# Altium PCB Surf5_R110.PcbDoc
Units mm, origin at the board's own origin, x right, y up, seen from the top; angles counter-clockwise.
Board outline 75 x 21 mm, 4 copper layers (Top Layer, Internal Plane 1, Internal Plane 2, Bottom Layer), stack 0.603 mm thick; 72 components, 94 nets, 359 pads, 160 vias.
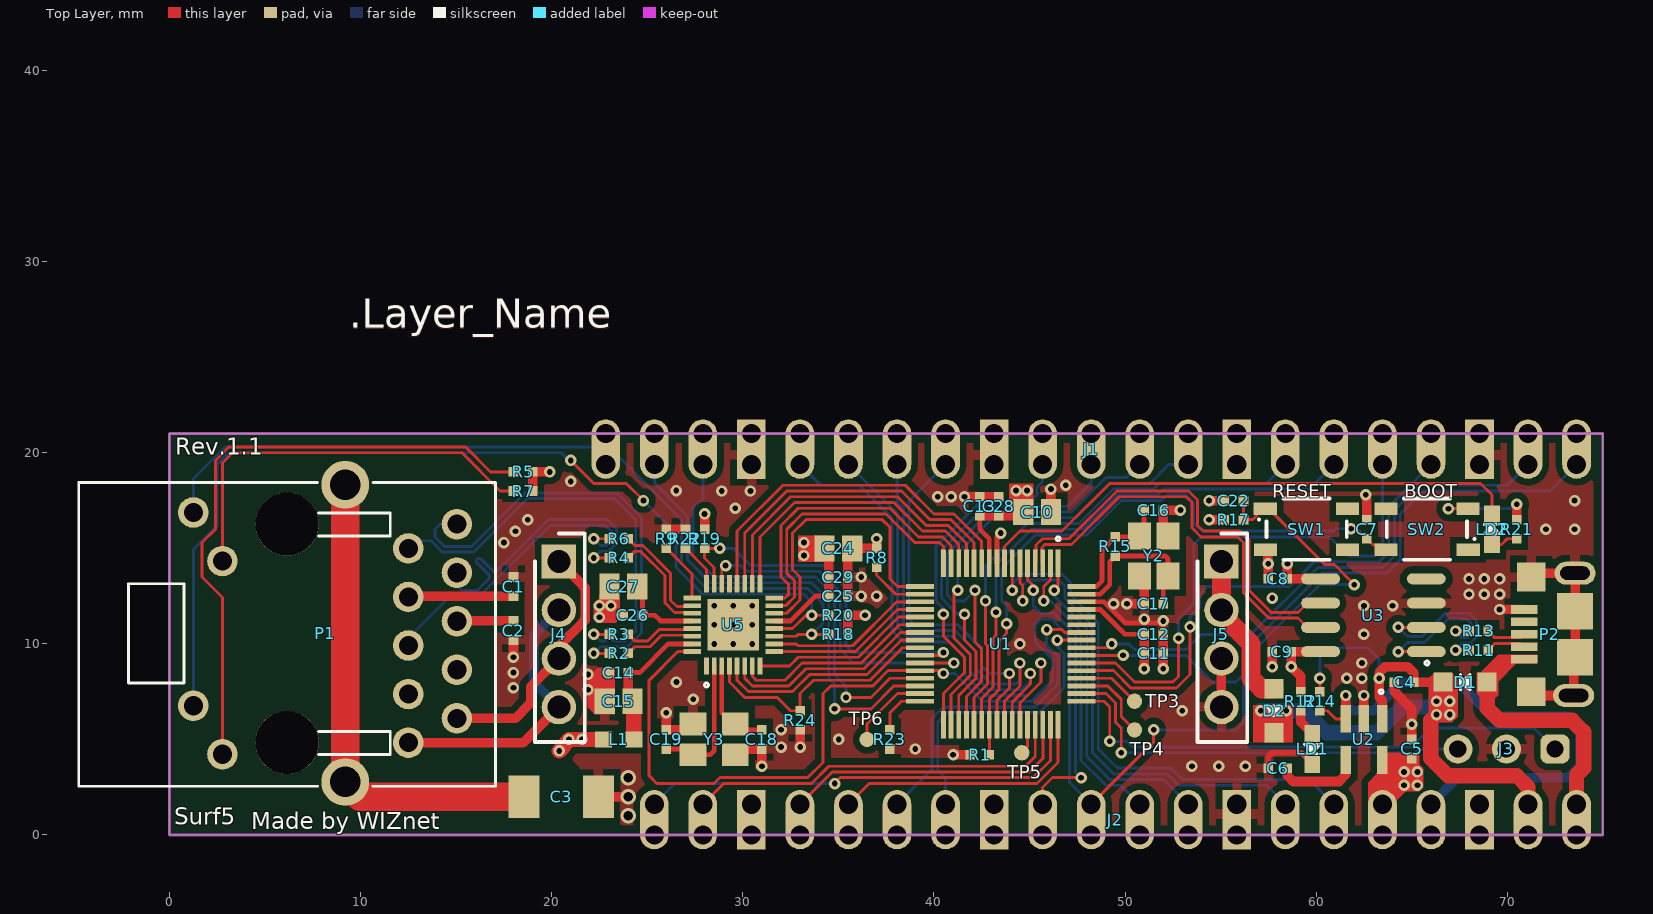
[diagram p0: Top Layer view]
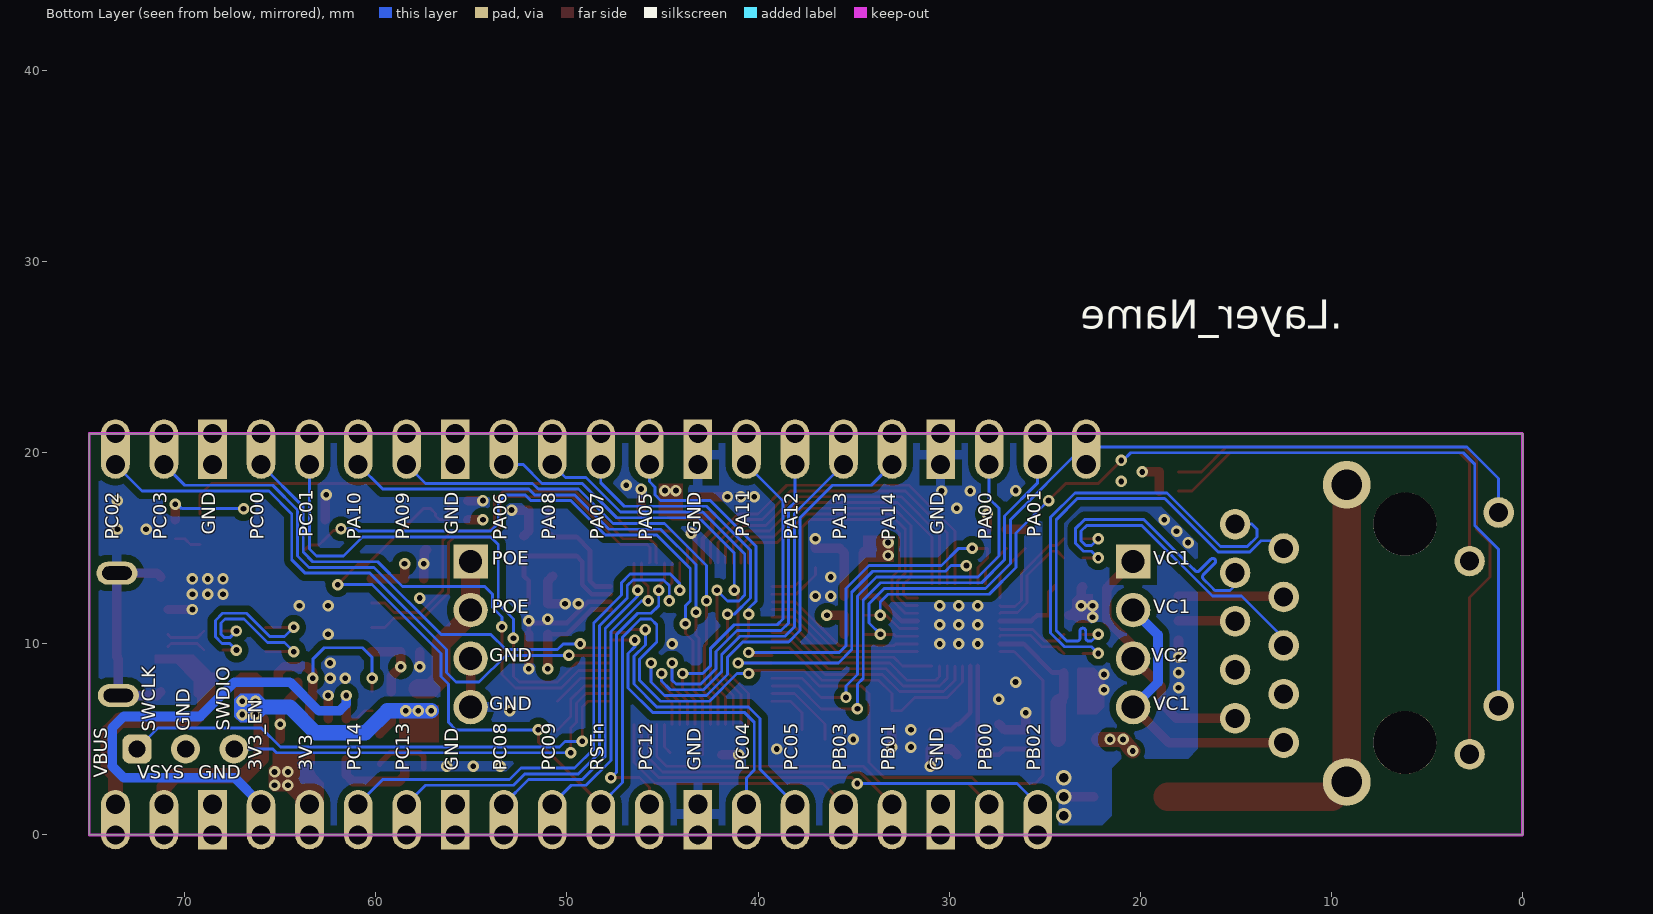
[diagram p1: Bottom Layer view, seen from below]
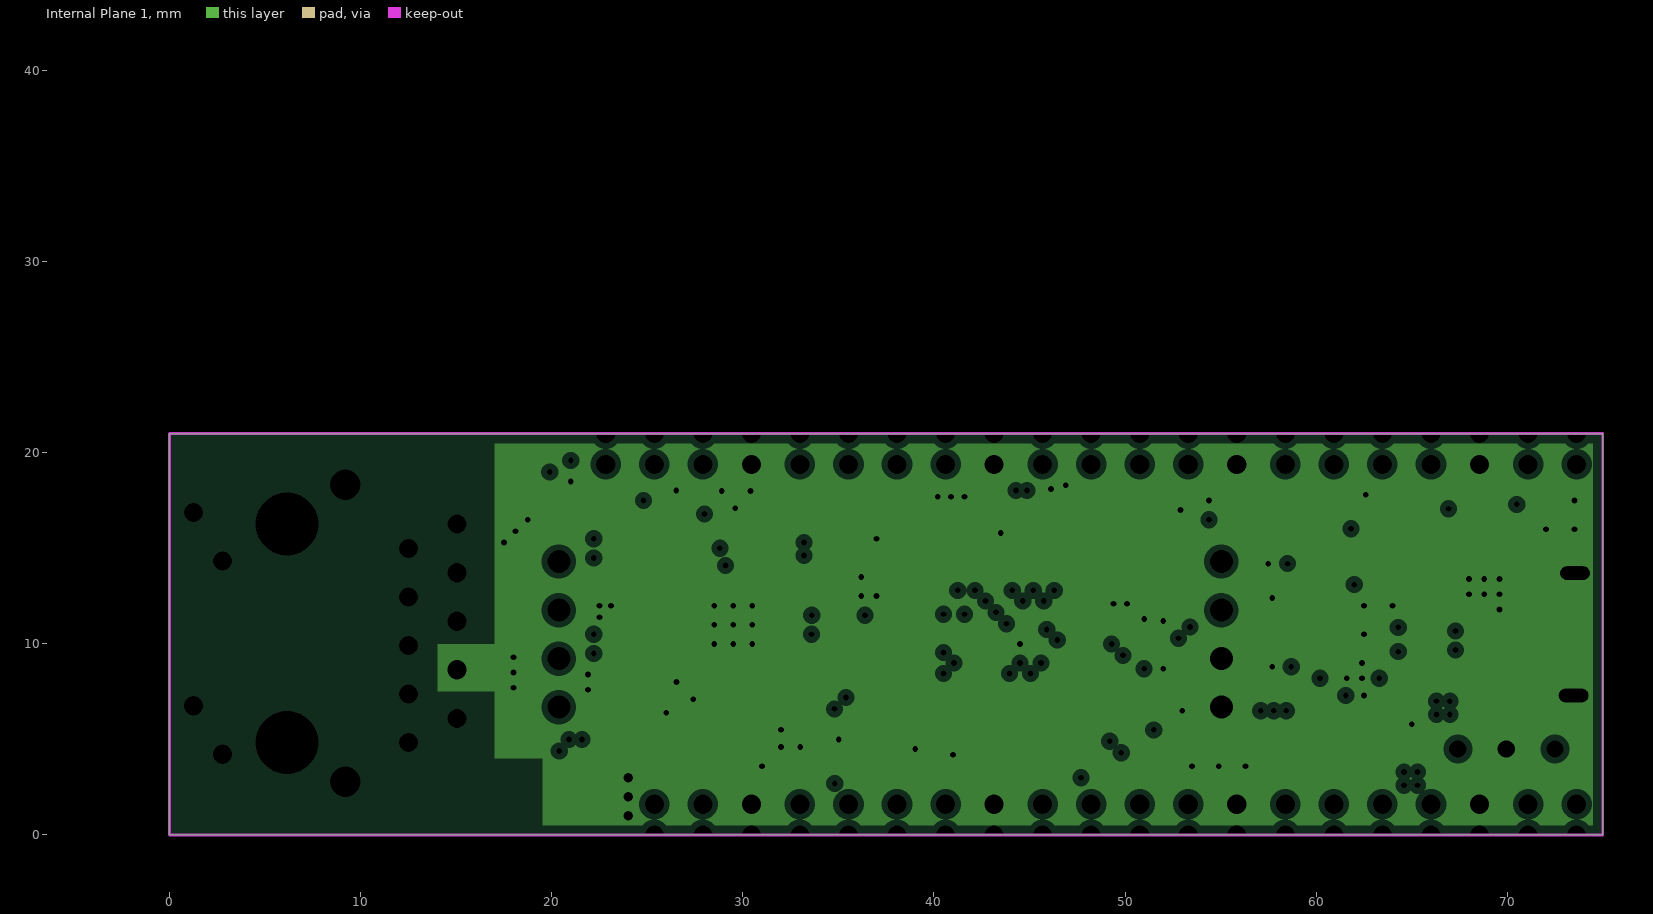
[diagram p2: Internal Plane 1, clearances drawn from the general rule]
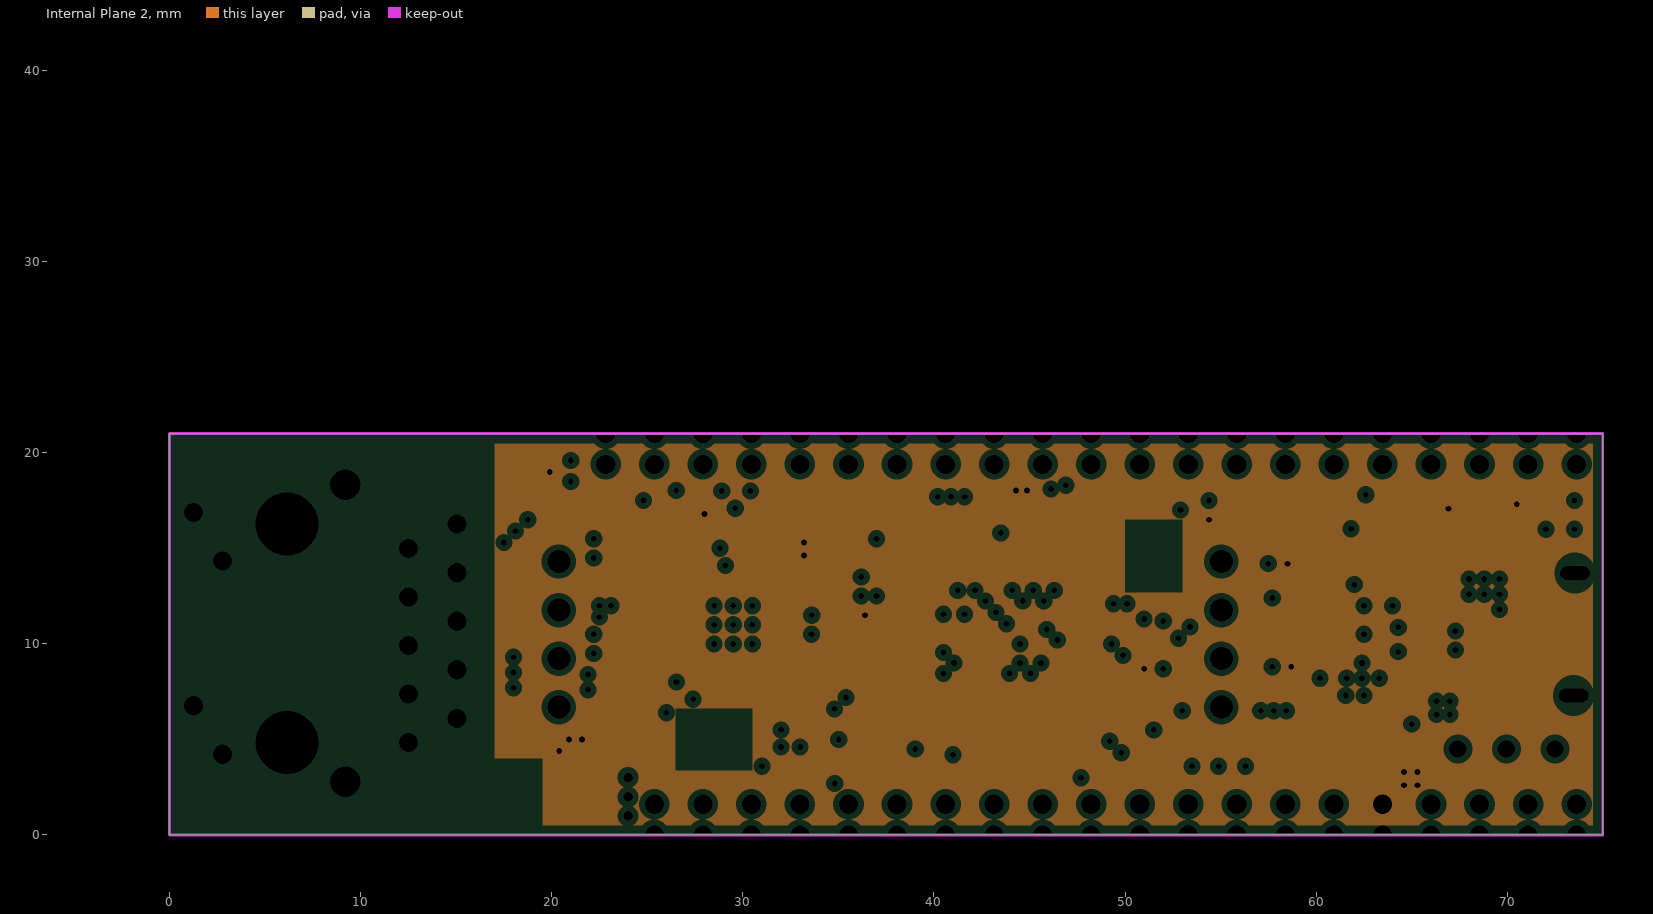
[diagram p3: Internal Plane 2, clearances drawn from the general rule]
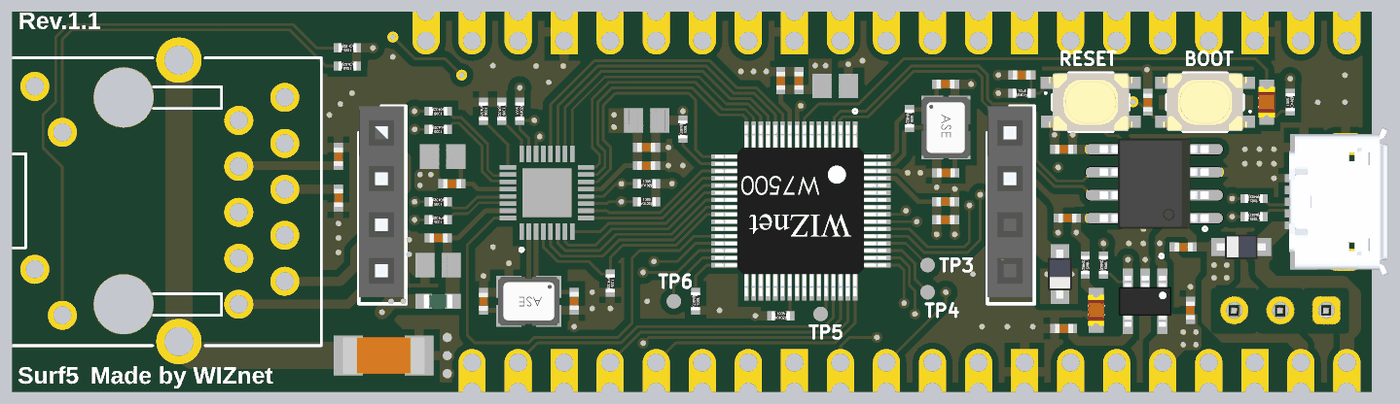
[diagram p4: 3D render of the assembled board from above, using the file's embedded part models]

## Layer stack, top to bottom
Top Solder: solder mask 0.0102, Solder Resist, Dk 3.5
Top Layer: signal copper 0.0356
Dielectric 1: prepreg 0.0711, PP-006, Dk 4.1
Internal Plane 1: plane copper 0.035, net GND
Dielectric1: prepreg 0.32, FR-4, Dk 4.8
Internal Plane 2: plane copper 0.035, net VDD_3.3V
Dielectric 2: prepreg 0.0711, PP-006, Dk 4.1
Bottom Layer: signal copper 0.0356
Bottom Solder: solder mask 0.0102, Solder Resist, Dk 3.5

## Board outline
0,0 75,0 75,21 0,21

## Design rules (kind name [scope] priority, off if disabled: settings)
BoardOutlineClearance [All] p1: gap=0.5 ignorepadtopadclearanceinfootprint=FALSE
Clearance [All] p1: gap=0.15 ignorepadtopadclearanceinfootprint=FALSE except(0.35: Arc-Poly Track-Poly SMDPad-Poly THPad-Poly Via-Poly Fill-Poly Poly-Poly Poly-Region Poly-Text Poly-Hole)
DiffPairsRouting [All] p1: maxlimit=0.15 minlimit=0.15 mostfreqgap=0.15 toplayer_minwidth=0.15 toplayer_maxwidth=0.15 toplayer_prefwidth=0.15 bottomlayer_minwidth=0.15 bottomlayer_maxwidth=0.15 bottomlayer_prefwidth=0.15 maxuncoupledlength=15.24
HoleSize [All] p1: absolutevalues=TRUE maxlimit=4.064 minlimit=0.025 maxpercent=80.000 minpercent=20.000
PlaneClearance [All] p1: clearance=0.3
PlaneConnect [All] p1: planeconnectstyle=Direct reliefexpansion=0.508 reliefentries=4 reliefconductorwidth=0.254 reliefairgap=0.254
PolygonConnect [All] p1: thpad.connectstyle=Relief thpad.reliefconductorwidth=0.5 thpad.reliefentries=4 thpad.polygonreliefangle="90 Angle" thpad.airgapwidth=0.35 smdpad.connectstyle=Relief smdpad.reliefconductorwidth=0.5 smdpad.reliefentries=4 smdpad.polygonreliefangle="90 Angle" smdpad.airgapwidth=0.35 via.connectstyle=Direct via.reliefconductorwidth=0.6 via.reliefentries=4 via.polygonreliefangle="45 Angle" via.airgapwidth=0.35
RoutingVias [All] p1: holewidth=0.3 width=0.6 viastyle="Through Hole" minholewidth=0.3 minwidth=0.6 maxholewidth=0.5 maxwidth=0.8
SolderMaskExpansion [All] p1: expansion=0 istentingtop=FALSE
Width [All] p1: maxlimit=3 minlimit=0.1 preferedwidth=0.15
26 further rules are at their usual default settings.

## Classes and differential pairs
differential pair NewDifferentialPair2: +U_RXD2 -U_TXD2
differential pair NewDifferentialPair1: +NetP2_2 -NetP2_3
differential pair USB_D: +USB_D_P -USB_D_N
differential pair MDI_T: +MDI_T_P -MDI_T_N
differential pair MDI_R: +MDI_R_P -MDI_R_N
differential pair MDI0_T: +MDI0_T_P -MDI0_T_N
differential pair MDI0_R: +MDI0_R_P -MDI0_R_N

## Components (designator, comment, footprint, x,y, rotation, side; value= is the part's Value field where it differs from the comment)
C1 "0.1uF" CAP-0402 18,13 r270 top
C2 "0.1uF" CAP-0402 18,10.7 r90 top
C3 "1nF/2kV" CAP-1808 20.5,2 r180 top
C4 "1uF" CAP-0402 64.6,8 r0 top
C5 "1uF" CAP-0402 65,4.5 r270 top
C6 "0.1uF" CAP-0402 58,3.5 r0 top
C7 "0.1uF" CAP-0402 62.65,16 r270 top
C8 "0.1uF" CAP-0402 58,13.4 r0 top
C9 "0.1uF" CAP-0402 58.2,9.6 r0 top
C10 "10uF/10V" CAP-0805-3 45.4,16.9 r180 top
C11 "0.1uF" CAP-0402 51.5,9.5 r180 top
C12 "0.1uF" CAP-0402 51.5,10.5 r180 top
C13 "0.1uF" CAP-0402 42.4,17.2 r270 top
C14 "0.1uF" CAP-0402 23.5,8.5 r0 top
C15 "10uF/10V" CAP-0805-3 23.5,7 r0 top
C16 "30pF" CAP-0402 51.5,17 r180 top
C17 "30pF" CAP-0402 51.5,12.1 r0 top
C18 "27pF" CAP-0402 31,5 r90 top
C19 "27pF" CAP-0402 26,5 r270 top
C22 "0.1uF" CAP-0402 55.7,17.5 r180 top
C24 "10uF/10V" CAP-0805-3 35,15 r180 top
C25 "0.1uF" CAP-0402 35,12.5 r180 top
C26 "0.1uF" CAP-0402 24.25,11.5 r0 top
C27 "10uF/10V" CAP-0805-3 23.75,13 r0 top
C28 "0.1uF" CAP-0402 43.4,17.2 r270 top
C29 "0.1uF" CAP-0402 35,13.5 r180 top
D1 "BAT60A" SOD-323(1-C,2-A) 67.8,8 r0 top
D2 "BAT60A" SOD-323(1-C,2-A) 57.8,6.5 r90 top
J1 "2.54mm 1x21 Pin Header DIP" IDC-1X21 73.63,19.39 r180 top locked
J2 "2.54mm 1x20 Pin Header DIP" IDC-1X20 25.37,1.61 r0 top locked
J3 "2.54mm 1x3 Pin Header DIP" IDC-1X3 72.5,4.5 r180 top
J4 "Header Socket 1x4_2.54mm" Header-Socket(DIP)_4x1_2.54mm 20.375,14.31 r270 top locked
J5 "Header Socket 1x4_2.54mm" Header-Socket(DIP)_4x1_2.54mm 55.044,14.31 r270 top locked
L1 "HH-1M1608-121JT" IND-0603 23.5,5 r0 top
LD1 "Red" LED-0603-RED 59.8,4.5 r270 top
LD2 "Green" LED-0603-RED 69.2,16 r90 top locked
P1 "RB1-ZZ-0049" RB1-ZZ-0049 6.15,10.55 r270 top
P2 "Micro USB" "Micro 5P B DBX 6.4" 75,10.5 r180 top locked
R1 "4.7K" RES-0402 42.4,4.2 r0 top
R2 "3.3R" RES-0402 23.5,9.5 r180 top
R3 "3.3R" RES-0402 23.5,10.5 r180 top
R4 "3.3R" RES-0402 23.5,14.5 r180 top
R5 "330R" RES-0402 18.5,19 r180 top
R6 "3.3R" RES-0402 23.5,15.5 r180 top
R7 "330R" RES-0402 18.5,18 r180 top
R8 "4.7K" RES-0402 37,14.5 r270 top
R9 "6.19K/1%" RES-0402 26,15.5 r270 top
R11 "3R3" RES-0402 68.5,9.675 r180 top
R12 "470R" RES-0402 59.2,7 r270 top
R13 "3R3" RES-0402 68.5,10.675 r180 top
R14 "100K" RES-0402 60.2,7 r270 top
R15 "1M" RES-0402 49.5,15.1 r270 top
R17 "4.7K" RES-0402 55.7,16.5 r0 top
R18 "5.1K" RES-0402 35,10.5 r0 top
R19 "5.1K" RES-0402 28,15.5 r90 top
R20 "5.1K" RES-0402 35,11.5 r0 top
R21 "330R" RES-0402 70.5,16 r90 top
R22 "5.1K" RES-0402 27,15.5 r270 top
R23 "4.7K" RES-0402 37.7,5 r270 top
R24 "5.1K" RES-0402 33,6 r270 top
SW1 "1188" TS204225WT160SMTTR 59.5,16 r0 top
SW2 "1188" TS204225WT160SMTTR 65.8,16 r180 top
TP3 "TPS" TPS 50.5,7 r270 top
TP4 "TPS" TPS 50.5,5.5 r270 top
TP5 "TPS" TPS 44.6,4.3 r270 top
TP6 "TPS" TPS 36.5,5 r270 top
U1 "W7500" W7500-LQFP64 43.5,10 r270 top locked
U2 "LM8805SF5-33V" SOT-23-5L 62.5,5 r270 top
U3 "USB to Uart" CH340N 63,11.5 r90 top
U5 "IP101GR/GRI" QFN32(0.4/4X4) 29.5,11 r90 top
Y2 "12MHz" OSC-TZ1067B 51.5,14.6 r270 top
Y3 "25MHz" OSC-82J0626 28.5,5 r180 top

## Footprints (in the part's own frame and the unit in brackets; to place one, negate y for a bottom-side part, rotate by r counter-clockwise, add the part's x,y. Pads: shape width x height; smd on the part's side, far side on the other; paste and mask are expansions set on the pad)
CAP-0402 [mm]
  rect 0.5x0.5 smd: 1(-0.5,0) 2(0.5,0)
  body extent -0.48,-0.25 0.52,0.25, height 0.6
CAP-0805-3 [mm]
  rect 1.055x1.356 smd paste+0 mask+0: 1(-0.726,0) 2(0.726,0)
  body extent -1.35,-0.82 1.35,0.82, height 0.25
CAP-1808 [mm] "Ceramic CAP 1808(4520)"
  rect 1.6x2.2 smd: 1(-1.95,0) 2(1.95,0)
  body extent -2.25,-1.02 2.25,1.01, height 2
CH340N [mm]
  oval 0.574x2.036 smd paste+0 mask+0.051: 1(-1.905,-2.768) 2(-0.635,-2.768) 3(0.635,-2.768) 4(1.905,-2.768) 5(1.905,2.768) 6(0.635,2.768) 7(-0.635,2.768) 8(-1.905,2.768)
  body extent -2.5,-3.01 2.5,3.01, height 1.75
Header-Socket(DIP)_4x1_2.54mm [mm]
  rect 1.8x1.8 hole 1.2: 1(0,0)
  round 1.8 hole 1.2: 2(2.54,0) 3(5.08,0) 4(7.62,0)
  silkscreen extent -1.47,-1.25 9.44,1.35, body extent -1.47,-1.25 9.09,1.25, height 8.65
IDC-1X3 [mil]
  rrect50% 60x60 hole 36: 1(0,0)
  round 60 hole 36: 2(100,0) 3(200,0)
  body extent -49,-49 251,51, height 336
IDC-1X20 [mm]
  oval 1.5x2.5 hole 1 copper offset 0,0.5: 1(0,-1.61) 2(2.54,-1.61) 4(7.62,-1.61) 5(10.16,-1.61) 6(12.7,-1.61) 7(15.24,-1.61) 9(20.32,-1.61) 10(22.86,-1.61) 11(25.4,-1.61) 12(27.94,-1.61) 14(33.02,-1.61) 15(35.56,-1.61) 16(38.1,-1.61) 17(40.64,-1.61) 19(45.72,-1.61) 20(48.26,-1.61)
  oval 1.5x2.5 hole 1 copper offset 0,-0.5: 1(0,0) 2(2.54,0) 4(7.62,0) 5(10.16,0) 6(12.7,0) 7(15.24,0) 9(20.32,0) 10(22.86,0) 11(25.4,0) 12(27.94,0) 14(33.02,0) 15(35.56,0) 16(38.1,0) 17(40.64,0) 19(45.72,0) 20(48.26,0)
  rect 1.5x2.5 hole 1 copper offset 0,0.5: 3(5.08,-1.61) 8(17.78,-1.61) 13(30.48,-1.61) 18(43.18,-1.61)
  rect 1.5x2.5 hole 1 copper offset 0,-0.5: 3(5.08,0) 8(17.78,0) 13(30.48,0) 18(43.18,0)
IDC-1X21 [mm]
  oval 1.5x2.5 hole 1 copper offset 0,-0.5: 1(0,0) 2(2.54,0) 4(7.62,0) 5(10.16,0) 6(12.7,0) 7(15.24,0) 9(20.32,0) 10(22.86,0) 11(25.4,0) 12(27.94,0) 14(33.02,0) 15(35.56,0) 16(38.1,0) 17(40.64,0) 19(45.72,0) 20(48.26,0) 21(50.8,0)
  oval 1.5x2.5 hole 1 copper offset 0,0.5: 1(0,-1.61) 2(2.54,-1.61) 4(7.62,-1.61) 5(10.16,-1.61) 6(12.7,-1.61) 7(15.24,-1.61) 9(20.32,-1.61) 10(22.86,-1.61) 11(25.4,-1.61) 12(27.94,-1.61) 14(33.02,-1.61) 15(35.56,-1.61) 16(38.1,-1.61) 17(40.64,-1.61) 19(45.72,-1.61) 20(48.26,-1.61) 21(50.8,-1.61)
  rect 1.5x2.5 hole 1 copper offset 0,0.5: 3(5.08,-1.61) 8(17.78,-1.61) 13(30.48,-1.61) 18(43.18,-1.61)
  rect 1.5x2.5 hole 1 copper offset 0,-0.5: 3(5.08,0) 8(17.78,0) 13(30.48,0) 18(43.18,0)
IND-0603 [mm] "Inductor 0603(1608)"
  rect 0.89x0.82 smd: 1(-0.8,0) 2(0.8,0)
  body extent -0.8,-0.4 0.8,0.4, height 0.95
LED-0603-RED [mm] "LED-0603-RED"
  rect 0.89x0.82 smd: 1(-0.8,0) 2(0.8,0)
  body extent -0.85,-0.45 0.85,0.45, height 0.9
"Micro 5P B DBX 6.4" [mm]
  rect 1.38x0.45 smd: 1(4.11,1.3) 2(4.11,0.65) 3(4.11,0) 4(4.11,-0.65) 5(4.11,-1.3)
  oval 2.15x1.2 hole 0.7 slot 1.55 at 0 deg: 6(1.524,3.2) 7(1.45,-3.2)
  rect 1.9x1.9 smd: 8(1.45,1.2) 9(1.45,-1.2)
  rect 1.5x1.5 smd: 10(3.75,-3) 11(3.75,3)
  body extent -0.88,-4.1 4.55,4.1, height 2.68
OSC-82J0626 [mm]
  rect 1.4x1.2 smd: 1(-1.1,-0.8) 2(1.1,-0.8) 3(1.1,0.8) 4(-1.1,0.8)
  body extent -1.7,-1.35 1.7,1.35, height 1.06
OSC-TZ1067B [mm]
  rect 1.4x1.2 smd: 1(-1.05,-0.75) 2(1.05,-0.75) 3(1.05,0.75) 4(-1.05,0.75)
  body extent -1.7,-1.35 1.7,1.35, height 1.06
QFN32(0.4/4X4) [mm]
  rect 0.9x0.25 smd: 1(-2.15,1.4) 2(-2.15,1) 3(-2.15,0.6) 4(-2.15,0.2) 5(-2.15,-0.2) 6(-2.15,-0.6) 7(-2.15,-1) 8(-2.15,-1.4) 17(2.15,-1.4) 18(2.15,-1) 19(2.15,-0.6) 20(2.15,-0.2) 21(2.15,0.2) 22(2.15,0.6) 23(2.15,1) 24(2.15,1.4)
  rect 0.25x0.9 smd: 9(-1.4,-2.15) 10(-1,-2.15) 11(-0.6,-2.15) 12(-0.2,-2.15) 13(0.2,-2.15) 14(0.6,-2.15) 15(1,-2.15) 16(1.4,-2.15) 25(1.4,2.15) 26(1,2.15) 27(0.6,2.15) 28(0.2,2.15) 29(-0.2,2.15) 30(-0.6,2.15) 31(-1,2.15) 32(-1.4,2.15)
  rect 2.7x2.7 smd: 33(0,0)
  silkscreen extent -3.25,1.3 -3.05,1.5, body extent -2.1,-2.1 2.1,2.1, height 0.76
RB1-ZZ-0049 [mm]
  round 3.3 hole 3.3: 0(-5.715,0) 0(5.715,0)
  round 1.6 hole 1: L1(6.325,-3.38) L2(3.785,-4.9) L3(-3.785,-3.38) L4(-6.325,-4.9) R1(-5.715,8.89) R2(-4.445,6.35) R3(-3.175,8.89) R4(-1.905,6.35) R5(-0.635,8.89) R6(0.635,6.35) R7(1.905,8.89) R8(3.175,6.35) R9(4.445,8.89) R10(5.715,6.35)
  round 2.5 hole 1.6: S1(-7.775,3.05) S2(7.775,3.05)
  Top Layer pour cut-out: -8.8,-7.6 8.8,-7.6 8.8,-4.6 -8.8,-4.6
  Top Layer pour cut-out: -2.6,-8.3 -2.6,-5.4 2.6,-5.4 2.6,-8.3
  Top Layer pour cut-out: 5.13,1.65 5.13,5.4 6.33,5.4 6.33,1.65
  Top Layer pour cut-out: -6.3,1.65 -6.3,5.4 -5.1,5.4 -5.1,1.65
  silkscreen extent -7.9,-10.9 8,10.9, body extent -7.9,-10.9 8,10.9, height 13.35
RES-0402 [mm]
  rect 0.5x0.5 smd: 1(-0.5,0) 2(0.5,0)
  body extent -0.5,-0.25 0.5,0.25, height 0.35
SOD-323(1-C,2-A) [mm]
  rect 1x1 smd: 1(-1.15,0) 2(1.15,0)
  body extent -1.35,-0.67 1.35,0.68, height 0.79
SOT-23-5L [mm]
  rect 1.45x0.55 smd: 1(-1.075,0.95) 2(-1.075,0) 3(-1.075,-0.95) 4(1.075,-0.95) 5(1.075,0.95)
  body extent -1.4,-1.45 1.4,1.45, height 1.45
TPS [mm]
  round 0.8 smd: 1(0,0)
TS204225WT160SMTTR [mm]
  rect 1.23x0.65 smd: 1(-2.15,1.075)
  rect 1.2x0.65 smd: 2(2.15,1.075) 3(-2.15,-1.075) 4(2.15,-1.075)
  silkscreen extent -2.54,-1.6 2.1,1.6, body extent -2.3,-1.6 2.3,1.6, height 2.53
W7500-LQFP64 [mm]
  rect 1.45x0.25 smd: 1(-4.225,3) 2(-4.225,2.6) 3(-4.225,2.2) 4(-4.225,1.8) 5(-4.225,1.4) 6(-4.225,1) 7(-4.225,0.6) 8(-4.225,0.2) 9(-4.225,-0.2) 10(-4.225,-0.6) 11(-4.225,-1) 12(-4.225,-1.4) 13(-4.225,-1.8) 14(-4.225,-2.2) 15(-4.225,-2.6) 16(-4.225,-3) 33(4.225,-3) 34(4.225,-2.6) 35(4.225,-2.2) 36(4.225,-1.8) 37(4.225,-1.4) 38(4.225,-1) 39(4.225,-0.6) 40(4.225,-0.2) 41(4.225,0.2) 42(4.225,0.6) 43(4.225,1) 44(4.225,1.4) 45(4.225,1.8) 46(4.225,2.2) 47(4.225,2.6) 48(4.225,3)
  rect 0.25x1.45 smd: 17(-3,-4.225) 18(-2.6,-4.225) 19(-2.2,-4.225) 20(-1.8,-4.225) 21(-1.4,-4.225) 22(-1,-4.225) 23(-0.6,-4.225) 24(-0.2,-4.225) 25(0.2,-4.225) 26(0.6,-4.225) 27(1,-4.225) 28(1.4,-4.225) 29(1.8,-4.225) 30(2.2,-4.225) 31(2.6,-4.225) 32(3,-4.225) 49(3,4.225) 50(2.6,4.225) 51(2.2,4.225) 52(1.8,4.225) 53(1.4,4.225) 54(1,4.225) 55(0.6,4.225) 56(0.2,4.225) 57(-0.2,4.225) 58(-0.6,4.225) 59(-1,4.225) 60(-1.4,4.225) 61(-1.8,4.225) 62(-2.2,4.225) 63(-2.6,4.225) 64(-3,4.225)
  body extent -4.73,-4.74 4.73,4.72, height 1

## Part data
C1 C2 C4 C5 C6 C7 C8 C9 C11 C12 C13 C14 C16 C17 C18 C19 C22 C25 C26 C28 C29: library part CAP-0402, "Ceramic CAP 0402(1005)"
C3: library part CAP-1808, "Ceramic CAP 1808(4520)"
C10 C15 C24 C27: library part CAP-0805, "MLCC-0805(2012)"
D1 D2: library part DIODE-BAT60A, "Silicon Schottky Diode"
J4 J5: "Connector", Manufacturer_Name=Harwin, Manufacturer_Part_Number=M20-7820442, Mouser Part Number=855-M20-7820442, Datasheet Link=https://cdn.harwin.com/pdfs/M20-782.pdf, Height=8.65mm, Mouser Price/Stock=https://www.mouser.co.uk/ProductDetail/Harwin/M20-7820442?qs=vF78I%252BjhbY9ZgDLCXkGx4w%3D%3D
L1: library part IND-0603, "Inductor 0603(1608)"
LD1 LD2: library part LED-0603, "LED-0603"
P1: "PoE RJ45"
P2: library part "Micro USB 5P DBX6.4", "Micro USB B Connector SMD"
R1 R2 R3 R4 R5 R6 R7 R8 R9 R11 R12 R13 R14 R15 R17 R18 R19 R20 R21 R22 R23 R24: library part RES-0402, "RES-0402"
SW1 SW2: "Switch"
TP3 TP4 TP5 TP6: "Test_point", Contact Resistance=20mOhm, Manufacturer="Wurth Elektronik", Operating Temperature=-40to105degC, Package Reference=61300211121, Rated Current=3A, Withstanding Voltage=500VAC, Working Voltage=250VAC, Datasheet URL=https://katalog.we-online.de/em/datasheet/6130xx11121.pdf, Gender=Male, Manufacturer URL=http://www.we-online.de, Mounting Technology=THT, Orientation=Vertical, Packaging=Bag, Part Number=61300211121, Pin Number=2, Pitch=2.54mm, Publisher=WurthElektronik, Row Number=Single
U1: "WIZnet ARM Cortex-M0"
U2: "600mA CMOS LDO Regulator"
U3: library part CH340N
Y2: library part OSC-TZ1067B-12MHz, "X-tal 12MHz,3.2x2.5 SMD, CL=20pF"
Y3: library part OSC-82J0626-25MHz, "X-tal 25MHz,3.2x2.5 SMD, CL=18pF"
U5: Pakage=VQFN-32, Part_name=IP101GR/GRI

## Free pads (board coordinates)
  round 0 on Mech16 paste+0 mask+0: 1(75.55,40.725)

## Via types
v1: diameter 0.6, hole 0.3, Top Layer to Bottom Layer, tented both sides, 153 vias
v2: diameter 0.6, hole 0.3, Top Layer to Bottom Layer, 4 vias
v3: diameter 0.8, hole 0.5, Top Layer to Bottom Layer, tented both sides, 3 vias

## Nets (pads, with @x,y where several pads share a name; then routed paths per layer and width w, separated by ;. In a path a pad name is that pad's centre, name@x,y a point inside that pad or via, vN(x,y) a via of type N, cw(c..) or ccw(c..) an arc to the next point about the centre after c; other vN are vias at no path point)
3V3_EN: J2.17 R14.2 U2.3 | length 27.8
  Top Layer w0.15: R14.2 60.6,6.5 61.025,6.075 U2.3
  Top Layer w0.5: U2.3 v1(61.55,7.3)
  Bottom Layer w0.5: v1(61.55,7.3) 61.55,6.85 61.9,6.5 63,6.5 64.5,8 67.4,8 69.2,6.2 73.2,6.2 73.8,5.6 73.8,3.6 73.2,3 67.4,3 J2.17@66.01,1.61
BOOT: C7.2 R1.2 SW2.2 U1.39 | length 33.9
  Top Layer w0.15: R1.2 U1.39 42.9,7.1 43.4,7.6 43.4,10.15 43.8,10.55 v1(43.8,11.05) ; v2(61.825,16.025) 61.911,15.939 62.211,15.939 C7.2 62.975,15.175 63.475,15.175 SW2.2@63.725,14.925
  Bottom Layer w0.15: v1(43.8,11.05) 43.8,12 43.55,12.25 43.55,13.95 45.3,15.7 48,15.7 49.8,17.5 51.9,17.5 52.2,17.8 53.2,17.8 53.6,17.4 53.6,16.3 54,15.9 60.916,15.9 61.041,16.025 v2(61.825,16.025)
CH_GND: C3.2 P1.S1 P1.S2 | length 25.2
  Top Layer w1.5: P1.S1 P1.S2 9.975,2 C3.2
COL: R24.1 U1.25 U5.4 | length 13.3
  Top Layer w0.15: U5.4 29.3,8 30.1,7.2 31.8,7.2 32.5,6.5 R24.1 33,7.4 33.7,8.1 36.65,8.1 38.35,9.8 U1.25
CRS: U1.11 U5.20 | length 18.9
  Top Layer w0.15: U5.20 29.7,15.9 32.1,18.3 38.5,18.3 40,16.8 41.05,16.8 42.5,15.35 U1.11
GND: C1.1 C2.1 C3.1 C4.1 C5.1 C6.1 C7.1 C8.1 C9.1 C10.1 C11.1 C12.1 C13.1 C14.1 C15.1 C16.1 C17.1 C18.1 C19.1 C22.2 C24.1 C25.1 C26.1 C27.1 C28.1 C29.1 J1.3 J1.8 J1.13 J1.18 J2.3 J2.8 J2.13 J2.18 J3.2 J5.3 J5.4 LD1.2 P1.R7 P2.5 P2.6 P2.7 P2.8 P2.9 P2.10 P2.11 R1.1 R8.1 R9.1 R22.1 R23.2 R24.2 SW1.3 U1.9 U1.62 U2.2 U3.3 U5.33 Y2.2 Y2.4 Y3.2 Y3.4 | length 60.6
  Top Layer w0.25: U1.9 43.3,15.6 v1(43.5,15.8) ; U1.62 48.9,12.2 50,11.1 51.8,11.1 52,10.9 C12.1
  Top Layer w0.3: C6.1 57.5,4.1 57.7,4.3 59.235,4.3 59.8,3.735 LD1.2
  Top Layer w0.45: v1(69.6,11.8) P2.5
  Top Layer w0.5: v1(18,9.3) C2.1 ; C3.1 v3(24,2) ; C15.1 C15.1@22.8,6.572 ; C27.1 23.081,12.943 23.081,12.019 v1(23.1,12) 23.127,12 23.627,11.5 C26.1 ; v1(26,6.4) C19.1 27.1,5.5 Y3.2 ; R9.1 R22.1 ; Y3.4 29.9,4.5 C18.1 v1(31,3.6) ; v1(33,4.6) R24.2 ; C25.1 C29.1 35.5,14.774 C24.1 R8.1 v1(37,15.5) ; v1(41,4.2) R1.1 ; v1(41.6,17.7) C13.1 C28.1 ; C10.1 v1(46.126,18.1) ; v1(50.1,12.1) C17.1 51,13.3 Y2.2 ; v1(52,8.7) C11.1 C12.1 ; Y2.4 52,15.9 C16.1 v1(52.9,17) ; v1(54.4,17.5) C22.2 ; J5.4 J5.3 ; SW1.3 57.406,14.925 57.481,14.85 57.481,14.219 v1(57.5,14.2) C8.1 ; v1(57.7,8.8) C9.1 ; U2.2 v1(62.5,7.3) ; v1(62.6,17.8) 62.619,17.781 62.619,17.597 62.65,17.566 C7.1 ; C4.1 64.1,7.5 65,6.6 v1(65,5.8) C5.1 ; P2.11 71.45,7.3 P2.6 73.476,9.226 P2.8 P2.9 P2.7 71.45,13.7 P2.10
  other v1: 53.5,3.6 54.9,3.6 56.3,3.6 39.025,4.5 32,4.6 35.025,5 32,5.5 53,6.5 27.4,7.1 21.9,7.6 18,7.7 26.525,8 61.6,8.2 62.4,8.2 21.9,8.4 18,8.5 62.4,9 28.5,10 29.5,10 30.5,10 44.5,10 62.5,10.5 28.5,11 29.5,11 30.5,11 52,11.2 51,11.3 22.5,11.4 22.5,12 28.5,12 29.5,12 30.5,12 62.5,12 64,12 49.4,12.1 57.7,12.4 36.2,12.5 37,12.5 68,12.6 68.8,12.6 69.6,12.6 68,13.4 68.8,13.4 69.6,13.4 36.2,13.5 17.5,15.3 18.1,15.9 72.025,16 73.525,16 18.75,16.5 29.6,17.1 73.525,17.5 40.2,17.7 40.9,17.7 28.9,18 30.4,18 26.521,18.021 46.9,18.3 21,18.5
  other v3: 24,1 24,3
LED_0: J1.21 P1.L4 R18.1 U5.11 | length 45.4
  Top Layer w0.15: U5.11 32.8,10.4 32.9,10.5 v1(33.6,10.5) R18.1
  Bottom Layer w0.15: P1.L4 1.25,18.65 2.9,20.3 22.206,20.3 22.83,19.676 J1.21@22.83,19.39 ; J1.21@22.83,20.3 23,20.3 26.8,16.5 26.8,14.2 28.1,12.9 33.4,12.9 34.2,12.1 34.2,11.1 v1(33.6,10.5)
LED_3: P1.L2 R20.1 U5.12 | length 52.6
  Top Layer w0.15: v2(21,19.6) 22.2,18.4 23.9,18.4 v2(24.8,17.5) ; U5.12 32.6,10.8 33.293,11.493 v1(33.607,11.493) 33.6,11.5 R20.1
  Bottom Layer w0.15: P1.L2 1.25,14.95 2.5,16.2 2.5,19.4 3.1,20 20.5,20 20.9,19.6 v2(21,19.6) ; v2(24.8,17.5) 26.5,15.8 26.5,14 27.9,12.6 33.2,12.6 33.607,12.193 v1(33.607,11.493)
MDC: U1.27 U5.22 | length 18.6
  Top Layer w0.15: U5.22 28.9,13.9 v1(29.1,14.1) ; U1.27 v1(41.05,9)
  Bottom Layer w0.15: v1(29.1,14.1) 29.9,14.1 30.2,13.8 34,13.8 35.1,12.7 35.1,9.7 35.8,9 v1(41.05,9)
MDI0_R_N: R6.1 U5.26 | length 5.7
  Top Layer w0.15: R6.1 24.35,15.15 24.774,15.15 26.225,13.699 26.225,12.275 26.55,11.95 27.3,11.95 U5.26
MDI0_R_P: R4.1 U5.27 | length 5.7
  Top Layer w0.15: R4.1 24.35,14.85 24.65,14.85 25.925,13.575 25.925,12.151 26.426,11.65 27.3,11.65 U5.27
MDI0_T_N: R3.1 U5.29 | length 3.8
  Top Layer w0.15: R3.1 24.35,10.15 25.026,10.15 25.626,10.75 27.3,10.75 U5.29
MDI0_T_P: R2.1 U5.30 | length 3.8
  Top Layer w0.15: R2.1 24.35,9.85 25.15,9.85 25.75,10.45 27.3,10.45 U5.30
MDI_R_N: P1.R6 R6.2 | length 16
  Top Layer w0.15: v1(22.2,15.5) R6.2
  Bottom Layer w0.15: P1.R6 12.5,10.3 14.7,12.5 16.224,12.5 19.924,16.2 22.8,16.2 23.1,15.9 23.1,15.4 22.85,15.15 22.55,15.15 v1(22.2,15.5)
MDI_R_P: P1.R3 R4.2 | length 16
  Top Layer w0.15: v1(22.2,14.5) R4.2
  Bottom Layer w0.15: P1.R3 15.04,13.06 15.3,12.8 16.1,12.8 16.275,12.975 16.702,13.402 ccw(c16.596,13.508) 16.702,13.614 16.1,14.217 cw(c16.206,14.323) 16.1,14.429 cw(c16.206,14.323) 16.312,14.429 16.914,13.826 ccw(c17.02,13.932) 17.126,13.826 17.392,14.092 19.8,16.5 22.924,16.5 23.4,16.024 23.4,15.276 22.974,14.85 22.55,14.85 v1(22.2,14.5)
MDI_T_N: P1.R2 R3.2 | length 24.2
  Top Layer w0.15: v1(22.2,10.5) R3.2
  Bottom Layer w0.15: P1.R2 12.905,15.4 13.676,15.4 14.276,14.8 15.924,14.8 18.724,17.6 23.3,17.6 24.4,16.5 24.4,10.7 23.85,10.15 23.681,10.15 23.306,10.15 cw(c23.306,10.3) 23.156,10.3 23.156,10.675 ccw(c23.006,10.675) 22.856,10.675 22.856,10.3 cw(c22.706,10.3) 22.706,10.15 22.55,10.15 22.3,10.4 v1(22.2,10.5)
MDI_T_P: P1.R1 R2.2 | length 24.1
  Top Layer w0.15: v1(22.2,9.5) R2.2
  Bottom Layer w0.15: P1.R1 14.165,16.265 13.9,16 13.9,15.6 14.4,15.1 15.8,15.1 18.6,17.9 23.424,17.9 24.7,16.624 24.7,10.576 23.974,9.85 22.55,9.85 v1(22.2,9.5)
MDIO: R19.1 U1.26 U5.23 | length 19.9
  Top Layer w0.15: U5.23 28.5,14 28,14.5 R19.1 v1(28.8,15) ; U1.26 40.35,9.4 v1(40.5,9.55)
  Bottom Layer w0.15: v1(28.8,15) 29.5,15 30.4,14.1 34.2,14.1 35.4,12.9 35.4,9.9 35.75,9.55 v1(40.5,9.55)
NetC1_2: C1.2 P1.R4 | length 5.5
  Top Layer w0.5: P1.R4 12.545,12.5 C1.2
NetC2_2: C2.2 P1.R5 | length 3
  Top Layer w0.5: P1.R5 15.055,11.2 C2.2
NetC6_2: C6.2 U2.4 | length 4.5
  Top Layer w0.5: C6.2 58.5,3.1 58.8,2.8 61.2,2.8 61.55,3.15 U2.4
NetLD1_1: LD1.1 R12.2 | length 1.4
  Top Layer w0.5: R12.2 59.2,5.9 LD1.1
NetLD2_1: LD2.1 R21.1 | length 1.4
  Top Layer w0.15: LD2.1 69.7,15.2 70,15.5 R21.1
NetP1_L1: P1.L1 R5.2 | length 32.5
  Top Layer w0.15: P1.L1 2.77,12.43 1.7,13.5 1.7,15.3 2.4,16 2.4,19.6 3.1,20.3 15.5,20.3 16.8,19 R5.2
NetP1_L3: P1.L3 R7.2 | length 21.4
  Top Layer w0.15: P1.L3 2.77,19.47 3.3,20 15.3,20 17.3,18 R7.2
NetP2_2: P2.2 R11.1 | length 2.1
  Top Layer w0.15: R11.1 69.35,10.025 70.715,10.025 P2.2
NetP2_3: P2.3 R13.1 | length 2.1
  Top Layer w0.15: R13.1 69.35,10.325 70.715,10.325 P2.3
NetR8_2: R8.2 U1.18 | length 3.1
  Top Layer w0.15: R8.2 37,13.6 38,12.6 U1.18
NetR9_2: R9.2 U5.25 | length 3.2
  Top Layer w0.15: R9.2 27.35,13.65 U5.25
NetR22_2: R22.2 U5.24 | length 2.3
  Top Layer w0.15: R22.2 28.1,13.9 U5.24
NetR23_1: R23.1 U1.32 | length 2.7
  Top Layer w0.15: R23.1 37.7,6.4 38.3,7 U1.32
NetTP3_1: TP3.1 U1.52 | length 3.3
  Top Layer w0.15: U1.52 49.3,8.2 TP3.1
NetTP4_1: TP4.1 U1.51 | length 4.3
  Top Layer w0.15: U1.51 49.1,7.8 49.8,7.1 49.8,6.2 TP4.1
NetTP5_1: TP5.1 U1.44 | length 1.6
  Top Layer w0.15: TP5.1 44.9,4.6 U1.44
NetTP6_1: TP6.1 U1.31 | length 4.2
  Top Layer w0.15: TP6.1 36.5,5.8 38.1,7.4 U1.31
PA_00: J1.19 U1.29 | length 23.1
  Top Layer w0.15: v1(35.4,7.2) 36.7,7.2 37.7,8.2 U1.29
  Bottom Layer w0.15: J1.19@27.91,19.39 27.91,17.61 27.4,17.1 27.4,14.6 28.5,13.5 33.8,13.5 34.8,12.5 34.8,8.4 35.4,7.8 v1(35.4,7.2)
PA_01: J1.20 U1.30 | length 24.8
  Top Layer w0.15: v1(34.8,6.6) 36.7,6.6 37.9,7.8 U1.30
  Bottom Layer w0.15: J1.20@25.37,19.39 25.37,18.43 27.1,16.7 27.1,14.4 28.3,13.2 33.6,13.2 34.5,12.3 34.5,8.2 34.8,7.9 v1(34.8,6.6)
PA_05: J1.12 U1.33 | length 18.5
  Top Layer w0.15: U1.33 40.5,7.4 41.6,8.5 41.6,9.3 40.5,10.4 v1(40.5,11.55)
  Bottom Layer w0.15: v1(40.5,11.55) 40.5,11.85 40.1,12.25 40.1,15.1 42.5,17.5 45.1,17.5 45.4,17.8 45.4,18.2 45.69,18.49 J1.12@45.69,19.39
PA_06: J1.9 U1.34 | length 23.8
  Top Layer w0.15: U1.34 40.9,7.35 41.9,8.35 41.9,9.45 41.05,10.3 41.05,12.6 v1(41.25,12.8)
  Bottom Layer w0.15: v1(41.25,12.8) 41.25,14.75 43.1,16.6 47.4,16.6 49.2,18.4 51.3,18.4 52.29,19.39 J1.9@53.31,19.39
PA_07: J1.11 U1.35 | length 20.7
  Top Layer w0.15: U1.35 41.3,7.3 42.2,8.2 42.2,9.6 41.6,10.2 v1(41.6,11.55)
  Bottom Layer w0.15: v1(41.6,11.55) 41.25,11.55 40.4,12.4 40.4,14.9 42.7,17.2 47,17.2 48.23,18.43 J1.11@48.23,19.39
PA_08: J1.10 U1.36 | length 23.5
  Top Layer w0.15: U1.36 41.7,7.25 42.5,8.05 42.5,9.75 42.15,10.1 v1(42.15,12.8)
  Bottom Layer w0.15: v1(42.15,12.8) 41.6,12.25 41,12.25 40.7,12.55 40.7,14.7 42.9,16.9 47.2,16.9 49,18.7 50.08,18.7 J1.10@50.77,19.39
PA_09: J1.7 U1.37 | length 26.5
  Top Layer w0.15: U1.37 42.1,7.2 42.8,7.9 42.8,9.9 42.7,10 v1(42.7,12.25)
  Bottom Layer w0.15: v1(42.7,12.25) 42.7,14.1 44.9,16.3 47.6,16.3 49.4,18.1 51.5,18.1 51.8,18.4 57.4,18.4 J1.7@58.39,19.39
PA_10: J1.6 U1.38 | length 28.5
  Top Layer w0.15: U1.38 42.5,7.15 43.1,7.75 43.1,10.3 43.25,10.45 v1(43.25,11.65)
  Bottom Layer w0.15: v1(43.25,11.65) 43.25,14.15 45.1,16 47.8,16 49.6,17.8 51.7,17.8 52,18.1 59.64,18.1 J1.6@60.93,19.39
PA_11: J1.14 U1.40 | length 18.8
  Top Layer w0.15: U1.40 43.3,7.05 43.95,7.7 v1(43.95,8.45)
  Bottom Layer w0.15: J1.14@40.61,19.39 38.7,17.48 38.7,11.3 39,11 41.25,11 42.5,9.75 42.5,8.85 42.9,8.45 v1(43.95,8.45)
PA_12: J1.15 U1.41 | length 20.9
  Top Layer w0.15: U1.41 43.7,7 44.5,7.8 v1(44.5,9)
  Bottom Layer w0.15: J1.15@38.07,19.39 38.07,17.43 38.4,17.1 38.4,11.1 38.8,10.7 41.1,10.7 42.2,9.6 42.2,8.7 43,7.9 44.3,7.9 44.5,8.1 v1(44.5,9)
PA_13: J1.16 U1.42 | length 22.1
  Top Layer w0.15: U1.42 44.1,6.95 45.05,7.9 v1(45.05,8.45)
  Bottom Layer w0.15: J1.16@35.53,19.39 38.1,16.82 38.1,10.9 38.6,10.4 40.95,10.4 41.9,9.45 41.9,8.55 42.85,7.6 44.6,7.6 45.05,8.05 v1(45.05,8.45)
PA_14: J1.17 U1.43 | length 26.6
  Top Layer w0.15: U1.43 44.5,6.9 45.6,8 v1(45.6,9)
  Bottom Layer w0.15: J1.17@32.99,19.39 34.08,18.3 36.1,18.3 37.8,16.6 37.8,10.7 38.4,10.1 40.8,10.1 41.6,9.3 41.6,8.4 42.7,7.3 44.9,7.3 45.6,8 v1(45.6,9)
PB_00: J2.2 U1.45 | length 20.1
  Top Layer w0.15: J2.2@27.91,1.61 29,2.7 33.6,2.7 34.5,3.6 44.8,3.6 45.3,4.1 U1.45
PB_01: J2.4 U1.46 | length 15.5
  Top Layer w0.15: J2.4@32.99,1.61 34.68,3.3 45,3.3 45.7,4 U1.46
PB_02: J2.1 U1.47 | length 23.6
  Top Layer w0.15: v1(34.811,2.689) 34.8,2.7 35.1,3 45.2,3 46.1,3.9 U1.47
  Bottom Layer w0.15: J2.1@25.37,1.61 26.449,2.689 v1(34.811,2.689)
PB_03: J2.5 U1.48 | length 13.9
  Top Layer w0.15: J2.5@35.53,1.61 36.62,2.7 45.4,2.7 46.5,3.8 U1.48
PC_00: J1.4 U1.53 | length 27.1
  Top Layer w0.15: U1.53 49.4,8.6 50.3,7.7 52.7,7.7 53.4,8.4 53.4,10.9 53.403,10.897 v1(53.403,10.885)
  Bottom Layer w0.15: v1(53.403,10.885) 53.403,11.403 53.9,11.9 53.9,12.6 54.3,13 58.6,13 59.9,14.3 63.3,14.3 63.8,14.8 63.8,17.18 J1.4@66.01,19.39
PC_01: J1.5 U1.54 | length 27.9
  Top Layer w0.15: U1.54 49.5,9 50.5,8 52.5,8 52.8,8.3 v1(52.8,10.3)
  Bottom Layer w0.15: v1(52.8,10.3) 52.8,11.3 53.6,12.1 53.6,15.2 54,15.6 60.7,15.6 61.7,14.6 63.1,14.6 63.47,14.97 J1.5@63.47,19.39
PC_02: J1.1 U1.55 | length 33.3
  Top Layer w0.15: U1.55 v1(49.9,9.4)
  Bottom Layer w0.15: v1(49.9,9.4) 53.2,9.4 54.6,8 55.8,8 56.3,8.5 56.3,9.7 60.3,13.7 63.7,13.7 64.4,14.4 64.4,16.8 65.6,18 72.24,18 J1.1@73.63,19.39
PC_03: J1.2 U1.56 | length 29
  Top Layer w0.15: U1.56 49.1,9.8 v1(49.3,10)
  Bottom Layer w0.15: v1(49.3,10) 50.2,10 50.5,9.7 53.2,9.7 54,10.5 56.6,10.5 60.1,14 63.5,14 64.1,14.6 64.1,17 65.4,18.3 70,18.3 J1.2@71.09,19.39
PC_04: J2.7 U1.57 | length 15.7
  Top Layer w0.15: v1(46.45,10.2) U1.57
  Bottom Layer w0.15: J2.7@40.61,1.61 40.61,2.99 40.2,3.4 40.2,5.9 40.7,6.4 45.5,6.4 46.8,7.7 46.8,9.5 46.45,9.85 v1(46.45,10.2)
PC_05: J2.6 U1.58 | length 17.6
  Top Layer w0.15: v1(45.9,10.75) 46.7,10.75 46.85,10.6 U1.58
  Bottom Layer w0.15: J2.6@38.07,1.61 39.9,3.44 39.9,6.1 40.5,6.7 45.3,6.7 46.5,7.9 46.5,9.35 45.9,9.95 v1(45.9,10.75)
PC_08: J2.12 U1.1 | length 17.3
  Top Layer w0.15: v1(46.3,12.8) 46.5,13 U1.1
  Bottom Layer w0.15: v1(46.3,12.8) 46.3,12.5 48,10.8 48,4.1 49.2,2.9 52.02,2.9 J2.12@53.31,1.61
PC_09: J2.11 U1.2 | length 15.5
  Top Layer w0.15: v1(45.75,12.25) 45.75,13 46.1,13.35 U1.2
  Bottom Layer w0.15: v1(45.75,12.25) 46.1,12.25 47.7,10.65 47.7,3.9 49,2.6 49.78,2.6 J2.11@50.77,1.61
PC_12: J2.9 U1.5 | length 15.9
  Top Layer w0.15: U1.5 44.9,13.35 45.2,13.05 v1(45.2,12.8) ; J2.9@45.69,1.61 45.69,2.49 46.2,3 v1(47.7,3)
  Bottom Layer w0.15: v1(45.2,12.8) 45.2,12 45.6,11.6 46.3,11.6 47.4,10.5 47.4,3.3 v1(47.7,3)
PC_13: J2.14 U1.6 | length 25.8
  Top Layer w0.15: U1.6 44.5,13.2 44.65,13.05 v1(44.65,12.25)
  Bottom Layer w0.15: v1(44.65,12.25) 44.65,13.05 44.95,13.35 46.55,13.35 46.85,13.05 46.85,12.4 48.3,10.95 48.3,4.3 49.4,3.2 52.2,3.2 52.8,2.6 57.4,2.6 J2.14@58.39,1.61
PC_14: J2.15 U1.7 | length 28
  Top Layer w0.15: v1(44.1,12.8) U1.7
  Bottom Layer w0.15: v1(44.1,12.8) 44.1,13.15 44.6,13.65 46.7,13.65 47.15,13.2 47.15,12.55 48.6,11.1 48.6,4.5 49.6,3.5 52.4,3.5 53,2.9 59.64,2.9 J2.15@60.93,1.61
POE: D2.2 J5.1 J5.2 | length 8.1
  Top Layer w1: J5.1 J5.2 ccw(c56.019,11.993) 55.31,11.288 55.808,10.789 56.308,10.29 56.6,9.998 56.6,8.2 57.15,7.65 D2.2
REGOUT: C26.2 C27.2 U5.28 | length 4.3
  Top Layer w0.25: C27.2 24.75,12.726 C26.2 25.4,11.5 25.7,11.2 U5.28
RSTn: C22.1 J2.10 R17.2 SW1.1 U1.28 U5.32 | length 79.1
  Top Layer w0.15: U5.32 26.6,9.6 25.1,8.1 25.1,3.1 25.5,2.7 28.5,2.7 28.8,3 33.4,3 34.2,3.8 34.2,7.4 34.6,7.8 36.8,7.8 37.6,8.6 U1.28 40.35,8.6 v1(40.5,8.45) ; J2.10@48.23,1.61 51.5,4.88 v1(51.5,5.5) ; C22.1 R17.2 56.675,16.5 56.875,16.7 56.875,16.825 57.125,17.075 57.325,17.075 57.525,17.075 60.453,14.147 60.961,14.147 62,13.108 v1(62,13.1)
  Bottom Layer w0.15: v1(40.5,8.45) 41.1,8.45 42.55,7 45.1,7 46.2,8.1 46.2,9.2 45.3,10.1 45.3,11 45.6,11.3 46.15,11.3 47.1,10.35 47.1,2.74 J2.10@48.23,1.61 ; v1(51.5,5.5) 55.8,5.5 56.2,5.9 56.2,7.9 56.6,8.3 56.6,9.5 60.2,13.1 v1(62,13.1)
RXC: U1.17 U5.14 | length 15.3
  Top Layer w0.15: U5.14 32.3,11.6 33,12.3 33,13.5 32.6,13.9 32.6,15.8 33.3,16.5 37.3,16.5 37.7,16.1 37.7,13.4 38.1,13 U1.17
RXD0: U1.13 U5.18 | length 16.6
  Top Layer w0.15: U5.18 30.5,15.7 32.5,17.7 38.1,17.7 39.6,16.2 40.75,16.2 41.7,15.25 U1.13
RXD1: U1.14 U5.17 | length 15.5
  Top Layer w0.15: U5.17 30.9,15.6 32.7,17.4 37.9,17.4 39.4,15.9 40.6,15.9 41.3,15.2 U1.14
RXD2: U1.15 U5.16 | length 15.6
  Top Layer w0.15: U5.16 32.2,12.4 32.4,12.6 32.4,13.1 32,13.5 32,16.2 32.9,17.1 37.7,17.1 39.2,15.6 40.45,15.6 40.9,15.15 U1.15
RXD3: U1.16 U5.15 | length 15.1
  Top Layer w0.15: U5.15 32.25,12 32.7,12.45 32.7,13.3 32.3,13.7 32.3,16 33.1,16.8 37.5,16.8 39,15.3 40.3,15.3 40.5,15.1 U1.16
RXDV: U1.12 U5.19 | length 17.8
  Top Layer w0.15: U5.19 30.1,15.8 32.3,18 38.3,18 39.8,16.5 40.9,16.5 42.1,15.3 U1.12
SWCLK: J3.1 U1.49 | length 27.7
  Top Layer w0.15: U1.49 48.9,7 49.2,6.7 v1(49.2,4.9)
  Bottom Layer w0.15: v1(49.2,4.9) 50.1,4.9 50.4,4.6 65,4.6 66,5.6 71.4,5.6 J3.1
SWDIO: J3.3 U1.50 | length 22.4
  Top Layer w0.15: U1.50 49,7.4 49.5,6.9 49.5,5.9 49.8,5.6 v1(49.8,4.3)
  Bottom Layer w0.15: v1(49.8,4.3) 65.2,4.3 65.4,4.5 J3.3
TXC: U1.19 U5.10 | length 8.6
  Top Layer w0.15: U5.10 32.8,10 32.9,9.9 35.75,9.9 38.05,12.2 U1.19
TXD0: U1.20 U5.9 | length 8.5
  Top Layer w0.15: U5.9 31.848,9.6 35.9,9.6 38.1,11.8 U1.20
TXD1: U1.21 U5.8 | length 9.4
  Top Layer w0.15: U5.8 32.45,8.85 32.9,9.3 36.05,9.3 38.15,11.4 U1.21
TXD2: U1.22 U5.7 | length 10.6
  Top Layer w0.15: U5.7 30.5,8.3 30.7,8.1 32.2,8.1 33.1,9 36.2,9 38.2,11 U1.22
TXD3: U1.23 U5.6 | length 11.2
  Top Layer w0.15: U5.6 30.1,8.2 30.5,7.8 32.4,7.8 33.3,8.7 36.35,8.7 38.25,10.6 U1.23
TXEN: U1.24 U5.5 | length 11.7
  Top Layer w0.15: U5.5 29.7,8.1 30.3,7.5 32.6,7.5 33.5,8.4 36.5,8.4 38.3,10.2 U1.24
U_RXD2: U1.4 U3.6 | length 22.2
  Top Layer w0.15: U1.4 45.35,14.275 45.35,15.174 45.676,15.5 47.076,15.5 49.576,18 53.324,18 53.8,17.524 53.8,16.2 54.1,15.9 56.024,15.9 56.5,15.424 56.5,12.8 57.65,11.65 59.05,11.65 59.535,12.135 U3.6
U_TXD2: U1.3 U3.7 | length 21.7
  Top Layer w0.15: U1.3 45.65,14.275 45.65,15.05 45.8,15.2 47.2,15.2 49.7,17.7 53.2,17.7 53.5,17.4 53.5,16.076 53.976,15.6 55.9,15.6 56.2,15.3 56.2,12.676 57.526,11.35 59.05,11.35 59.535,10.865 U3.7
USB_D_N: R11.2 U3.2 | length 9.4
  Top Layer w0.15: v1(64.3,10.865) U3.2 ; v1(67.3,9.675) R11.2
  Bottom Layer w0.15: v1(64.3,10.865) 64.785,10.38 65.556,10.38 66.776,11.6 68.024,11.6 68.4,11.224 68.4,10.376 68.049,10.025 67.65,10.025 v1(67.3,9.675)
USB_D_P: R13.2 U3.1 | length 8.4
  Top Layer w0.15: v1(64.3,9.595) U3.1 ; v1(67.3,10.675) R13.2
  Bottom Layer w0.15: v1(64.3,9.595) 64.785,10.08 65.68,10.08 66.9,11.3 67.9,11.3 68.1,11.1 68.1,10.5 67.925,10.325 67.65,10.325 v1(67.3,10.675)
USER_LED: LD2.2 U1.8 | length 29
  Top Layer w0.15: U1.8 43.7,15.1 44.5,15.9 46.7,15.9 49.2,18.4 68.6,18.4 69.2,17.8 LD2.2
VBUS: D1.2 J2.20 P2.1 | length 10.9
  Top Layer w0.8: D1.2 68.95,6.65 69.6,6 73.4,6 74,5.4 74,3.5 73.63,3.13 J2.20@73.63,1.61
VC1: J4.1 J4.3 P1.R9 | length 15.8
  Top Layer w0.5: P1.R9 18.105,6.105 18.9,6.9 18.9,7.755 J4.3 20.375,9.669 cw(c20.875,9.668) 20.52,10.02 21.605,11.105 ; 21.605,11.105 ccw(c21.25,11.457) 21.75,11.456 ; 21.605,11.105 21.75,11.25 21.75,11.456 ; 21.604,13.081 ccw(c21.25,12.728) 21.604,13.081 J4.1 21.604,13.081 ; 21.604,13.081 cw(c21.25,12.728) 21.75,12.728 ; 21.604,13.081 21.75,12.935 21.75,12.728 ; 21.75,11.456 ccw(c21.25,11.457) 21.75,11.457 ; 21.75,11.456 21.75,11.457 ; 21.75,11.457 21.75,12.728
VC2: J4.2 J4.4 P1.R10 | length 14.8
  Top Layer w0.5: P1.R10 18.52,4.835 J4.4
  Bottom Layer w0.5: J4.4 19.075,7.99 19.075,10.47 J4.2
VDD_3.3A: C14.2 C15.2 L1.2 U5.31 | length 7.6
  Top Layer w0.25: C14.2 24.6,8.5 26.1,10 U5.31
  Top Layer w0.5: C14.2 24,7.226 C15.2
  Top Layer w0.8: C15.2 24.3,6.926 L1.2
VDD_3.3V: C5.2 C8.2 C9.2 C10.2 C11.2 C12.2 C13.2 C24.2 C25.2 C28.2 C29.2 J2.16 L1.1 R5.1 R7.1 R12.1 R17.1 R18.2 R19.2 R20.2 R21.2 SW2.3 U1.10 U1.61 U2.5 U3.5 U3.8 U5.13 | length 39.9
  Top Layer w0.152: v2(66.925,17.075) SW2.3@67.875,17.075
  Top Layer w0.25: U5.13 32.5,11.2 33.8,12.5 C25.2 ; C13.2 42.4,16 42.9,15.5 U1.10 ; U1.61 48.7,11.8 50,10.5 C12.2
  Top Layer w0.5: R7.1 R5.1 v1(19.9,19) ; R19.2 v1(28,16.8) ; v1(33.2,14.625) 33.997,14.625 C24.2 34.5,14.774 C29.2 C25.2 ; R18.2 R20.2 v1(36.4,11.5) ; C13.2 C28.2 44.474,16.7 C10.2 44.752,17.065 ccw(c44.299,17.278) 44.781,17.146 ccw(c44.299,17.278) 44.797,17.229 v1(44.875,18.025) ; v1(51,8.7) C11.2 C12.2 ; v1(54.4,16.5) R17.1 ; v1(58.5,14.2) C8.2 60.227,13.4 U3.5 ; R12.1 59.2,8.3 v1(58.7,8.8) C9.2 58.705,9.595 U3.8 ; U2.5 63.525,4 C5.2 ; R21.2 v1(70.5,17.3)
  Top Layer w0.8: v1(20.4,4.4) 20.526,4.527 ccw(c19.958,5.091) 20.534,4.536 20.535,4.537 cw(c21.113,3.983) v1@20.541,4.543 ; v1@20.542,4.543 ccw(c19.97,5.104) 20.645,4.673 ; 20.645,4.674 cw(c21.32,4.245) 20.696,4.745 v1(20.9,5) v1(21.585,5) 22.17,5
  Bottom Layer w0.152: v2(66.925,17.075) 70.154,17.075 70.379,17.3 v1(70.5,17.3)
  other v1: 64.6,2.6 65.3,2.6 64.6,3.3 65.3,3.3 33.2,15.3 44.3,18.025
VSYS: C4.2 D1.1 D2.1 J2.19 R14.1 U2.1 | length 32.6
  Top Layer w0.15: R14.1 v1(60.2,8.2)
  Top Layer w0.5: U2.1 63.45,7.05 63.3,7.2 v1(63.3,8.2) 63.3,8.5 63.6,8.8 64.8,8.8 65.1,8.5 C4.2 D1.1
  Top Layer w0.8: v1(66.3,6.3) 66,6 66,4 66.9,3.1 70.5,3.1 71.09,2.51 J2.19@71.09,1.61
  Bottom Layer w0.15: v1(60.2,8.2) 60.2,9.3 60.7,9.8 62.7,9.8 63.3,9.2 v1(63.3,8.2)
  Bottom Layer w0.8: v1(57.1,6.5) v1(57.788,6.5) v1(58.44,6.5) 59.4,6.5 60.55,5.35 63.15,5.35 64.5,6.7 66.65,6.7
  other v1: 67,6.3 66.3,7 67,7
X1: C19.2 U5.2 Y3.3 | length 7.2
  Top Layer w0.25: C19.2 27.1,4.5 Y3.3 28.3,4.2 28.5,4.4 U5.2
X2: C18.2 U5.3 Y3.1 | length 4.9
  Top Layer w0.25: U5.3 28.9,6.4 29.5,5.8 Y3.1 29.9,5.5 C18.2
XIN: C17.2 R15.2 U1.63 Y2.3 | length 8.6
  Top Layer w0.25: U1.63 48.7,12.6 49.2,13.1 49.2,14.3 R15.2 52.1,14.6 52.25,14.45 Y2.3 52,13.3 C17.2
XOUT: C16.2 R15.1 U1.64 Y2.1 | length 6.5
  Top Layer w0.25: U1.64 48.5,13 48.8,13.3 48.8,14.9 R15.1 50.7,15.6 Y2.1 51,15.9 C16.2
pads on no net: P1.0 P1.R8 P2.4 SW1.2 SW1.4 SW2.1 SW2.4 U1.59 U1.60 U3.4 U5.1 U5.21

## Polygon pours and split planes (outlines as drawn)
GND on Bottom Layer "GND" (solid, remove dead copper, pour order 1): 17,4.5 17.5,4 21,4 21.5,3.5 21.5,1 22,0.5 74.5,0.5 74.5,20.5 17.5,20.5 17,20
GND on Top Layer "GND" (solid, remove dead copper, pour order 0): 17,4.5 17.5,4 21,4 21.5,3.5 21.5,1 22,0.5 74.5,0.5 74.5,20.5 17.5,20.5 17,20
VDD_3.3V on Internal Plane 2 (split plane): 74.49,0.51 19.5,0.51 19.5,4 17,4 17,7.5 17,10 17,20.49 74.49,20.49
GND on Internal Plane 1 (split plane): 74.49,0.51 19.5,0.51 19.5,4 17,4 17,7.5 14,7.5 14,10 17,10 17,20.49 74.49,20.49

## Keep-outs
Keep-Out Layer:
  the board outline again, w0.15
  text ".Layer_Name" at 9.398,26.5 h1.52

## Other copper
Top Layer:
  rectangle net VSYS: 56.7,4.85 58.8,6.8
  rectangle net VDD_3.3V: 32.9,14.286 34.5,15.678
  rectangle net VDD_3.3V: 43.937,16.7 45.202,18.4
  region net GND: 23.25,8.75 23.302,8.698 23.302,6.322 22.247,6.322 21.897,6.672 21.897,8.247 22.4,8.75
  region net VDD_3.3V: 63.175,3.2 62.72,2.745 62.72,1.11 64.22,1.11 64.22,1.82 64.7,2.3 65.4,2.3 65.6,2.5 65.6,3.5 65.4,3.7 65.4,4.3 63.7,4.3
  region net GND: 22.5,12.6 22.5,12.4 22.2,12.1 22.2,11.3 22.4,11.1 23.35,11.1 23.552,11.302 23.552,12.348 23.3,12.6
  region net VSYS: 65.9,6.2 66.2,5.9 67.1,5.9 67.4,6.2 67.4,8.2 67.1,8.5 66.2,8.5 65.9,8.2
  region net VDD_3.3V: 64.5,2.3 64.3,2.5 64.3,3.7 63.2,3.7 63.2,4.3 65.4,4.3 65.4,3.7 65.6,3.5 65.6,2.5 65.4,2.3
  region net VBUS: 68.7,7.1 69.3,7.1 69.525,7.325 69.525,8.025 70.475,8.975 71.58,8.975 71.58,9.425 69.525,9.425 68.6,8.5 68.4,8.5 68.4,7.4
  text ".Layer_Name" at 9.398,26.5 h1.52
Bottom Layer:
  region net VSYS: 66.1,7.4 67.1,7.4 67.4,7.1 67.4,6.2 67.1,5.9 66.2,5.9 65.7,6.4 65.7,7
  text ".Layer_Name" at 9.398,26.5 h1.52
Internal Plane 1 (plane layer: these items are gaps in the copper):
  region: 0,21 17,21 17,10 14,10 14,7.5 17,7.5 17,4 19.5,4 19.5,0 0,0
Internal Plane 2 (plane layer: these items are gaps in the copper):
  rectangle: 26.5,3.4 30.5,6.6
  rectangle: 50,12.7 53,16.5
  region: 0,21 17,21 17,10 17,7.5 17,4 19.5,4 19.5,0 0,0

## Silkscreen, mask and mechanical layers (free items; w line width, h text height)
Top Overlay:
  circle w0.15: c65.8,9 r0.103
  circle w0.15: c63.4,7.5 r0.103
  circle w0.15: c46.5,15.5 r0.103
  region: 69.2,16.25 69.6,15.75 68.8,15.75
  region: 59.8,4.25 59.4,4.75 60.2,4.75
  region: 57.8,6.25 57.4,6.75 58.2,6.75
  region: 67.55,8 68.05,8.4 68.05,7.6
  lines w0.15: 57.4,6.25 58.2,6.25 ; 59.4,4.25 60.2,4.25 ; 67.55,7.6 67.55,8.4 ; 68.8,16.25 69.6,16.25 ; 57.4,6.75 57.8,6.25 58.2,6.75 57.4,6.75 ; 59.4,4.75 59.8,4.25 60.2,4.75 59.4,4.75 ; 67.55,8 68.05,7.6 68.05,8.4 67.55,8 ; 68.8,15.75 69.6,15.75 69.2,16.25 68.8,15.75
  text ".Layer_Name" at 9.398,26.532 h1.52
  text "Rev.1.1" at 0.3,19.6 h1.5
  text "RESET" at 57.7,17.65 h0.7
  text "BOOT" at 64.6,17.65 h0.7
  text "Surf5" at 0.25,0.25 h1.5
  text "Made by WIZnet" at 4.275,0 h1.5
Bottom Overlay:
  text ".Layer_Name" at 9.398,26.5 h1.52
  text "GND" at 30.061,15.72 h1.2 r270
  text "GND" at 42.761,15.72 h1.2 r270
  text "GND" at 55.461,15.72 h1.2 r270
  text "GND" at 68.161,15.72 h1.2 r270
  text "PA01" at 24.986,15.569 h1.2 r270
  text "PA11" at 40.219,15.569 h1.2 r270
  text "PC01" at 63.081,15.569 h1.2 r270
  text "PC03" at 70.711,15.45 h1.2 r270
  text "PC02" at 73.211,15.458 h1.2 r270
  text "PA00" at 27.526,15.447 h1.2 r270
  text "PA13" at 35.146,15.44 h1.2 r270
  text "PA12" at 37.679,15.448 h1.2 r270
  text "PA05" at 45.306,15.426 h1.2 r270
  text "PA07" at 47.846,15.441 h1.2 r270
  text "PA08" at 50.386,15.441 h1.2 r270
  text "PA06" at 52.926,15.432 h1.2 r270
  text "PA09" at 58.006,15.444 h1.2 r270
  text "PA10" at 60.546,15.447 h1.2 r270
  text "PC00" at 65.621,15.447 h1.2 r270
  text "PA14" at 32.599,15.418 h1.2 r270
  text "VC1" at 19.312,13.915 h1.2
  text "POE" at 53.934,13.916 h1.2
  text "VC1" at 19.312,11.375 h1.2
  text "POE" at 53.934,11.376 h1.2
  text "VC2" at 19.433,8.835 h1.2
  text "GND" at 54.08,8.836 h1.2
  text "VC1" at 19.312,6.295 h1.2
  text "GND" at 54.08,6.296 h1.2
  text "SWDIO" at 67.416,5.444 h1.2 r270
  text "GND" at 69.516,5.42 h1.2 r270
  text "SWCLK" at 71.316,5.405 h1.2 r270
  text "PB02" at 24.991,3.36 h1.2 r270
  text "PB00" at 27.531,3.36 h1.2 r270
  text "GND" at 30.066,3.36 h1.2 r270
  text "PB01" at 32.611,3.36 h1.2 r270
  text "PB03" at 35.151,3.36 h1.2 r270
  text "PC05" at 37.686,3.36 h1.2 r270
  text "PC04" at 40.226,3.36 h1.2 r270
  text "GND" at 42.766,3.36 h1.2 r270
  text "PC12" at 45.305,3.36 h1.2 r270
  text "RSTn" at 47.846,3.36 h1.2 r270
  text "PC09" at 50.386,3.36 h1.2 r270
  text "PC08" at 52.926,3.36 h1.2 r270
  text "GND" at 55.466,3.36 h1.2 r270
  text "PC13" at 58.006,3.36 h1.2 r270
  text "PC14" at 60.545,3.36 h1.2 r270
  text "3V3" at 63.091,3.36 h1.2 r270
  text "3V3_EN" at 65.73,3.36 h1.2 r270
  text "VBUS" at 73.816,3 h1.2 r270
  text "GND" at 69.3,2.716 h1.2
  text "VSYS" at 72.5,2.716 h1.2
Top Paste:
  text ".Layer_Name" at 9.398,26.5 h1.52
Bottom Paste:
  text ".Layer_Name" at 9.398,26.5 h1.52
Top Solder:
  text ".Layer_Name" at 9.398,26.5 h1.52
Bottom Solder:
  text ".Layer_Name" at 9.398,26.5 h1.52
Drill Guide:
  text ".Layer_Name" at 9.398,26.5 h1.52
Mechanical 2:
  lines w0.127: 82.569,5.125 82.569,29.206 ; 82.57,5.166 ccw(c83.281,5.166) 83.281,4.455 121.033,4.455 ccw(c121.033,5.166) 121.744,5.166 ; 82.57,29.231 cw(c83.281,29.231) 83.281,29.942 121.033,29.942 cw(c121.033,29.231) 121.744,29.231 121.744,5.15 ; 84.094,21.435 121,21.435 ; 84.094,23.91 121,23.91
  lines w0.15: 0,0 0,21 75,21 75,0 0,0
  text "BOARD NAME : Surf5" at 0,37.676 h1.52
  text "VERSION : R110" at 0,34.882 h1.52
  text "SIZE : 75mmX21mmX1.0T" at 0,32.088 h1.52
  text "GERBER DATE : 2024.04.30" at 0,29.294 h1.52
  text "Layer Stack Up Detail for :" at 84.094,27.707 h1.02
  text "LAYER :" at 0,26.5 h1.52
  text "Surf5_R110.PcbDoc" at 84.094,25.167 h1.27
  text "Layer Name : 4L 1.6T" at 84.094,22.119 h1.02
  text "Top Layer" at 84.094,16.261 h1.52
  text "Internal Plane 1 (GND)" at 84.094,13.213 h1.52
  text "Internal Plane 2 (PWR)" at 84.094,10.117 h1.52
  text "Bottom Layer" at 84.094,7.069 h1.52
  text "KS Technology artwork" at 82.5,0 h5.08
Mechanical 3:
  lines w0.1: 58.75,8.15 58.75,5.85 59.05,5.85 59.05,2.85 60.8,2.85 60.8,8.2 58.8,8.2 ; 38.3,15.5 40.6,15.5 40.6,17.6 38.3,17.6 38.3,15.5
  lines w0.15: 40.6,17.6 40.7,17.6 ; 40.8,16.1 40.634,16.266 40.634,16.3 ; 40.8,16.5 40.634,16.334 40.634,16.3 ; 42,16.3 40.634,16.3 ; 54.2,3.8 53.922,4.078 53.904,4.078 ; 59.05,4.078 53.904,4.078 ; 53.904,4.078 54.2,4.374 53.904,4.078 ; 51.8,3.893 51.8,6 52.1,6 53.9,6 53.9,3.9 53.6,3.9 53.6,2.5 52.3,2.5 52.3,3.9 51.807,3.9 51.8,3.893
Drill Drawing:
  text ".Legend" at 84.26,31.5 h1.02
  text ".Layer_Name" at 9.398,26.5 h1.52

## Dimensions
75,0 to 75,21 on Mechanical 2
0,0 to 75,0 on Mechanical 2